# Altium PCB NucleoClone.PcbDoc (part 2 of 3)
Units mm, origin at the board's own origin, x right, y up, seen from the top; angles counter-clockwise.
Board outline 100 x 100 mm, 4 copper layers (Top Layer, Signal Layer 2, Signal Layer 1, Bottom Layer), stack 0.778 mm thick; 118 components, 177 nets, 571 pads, 394 vias.
Unrouted connection lines stored in the file: 5.
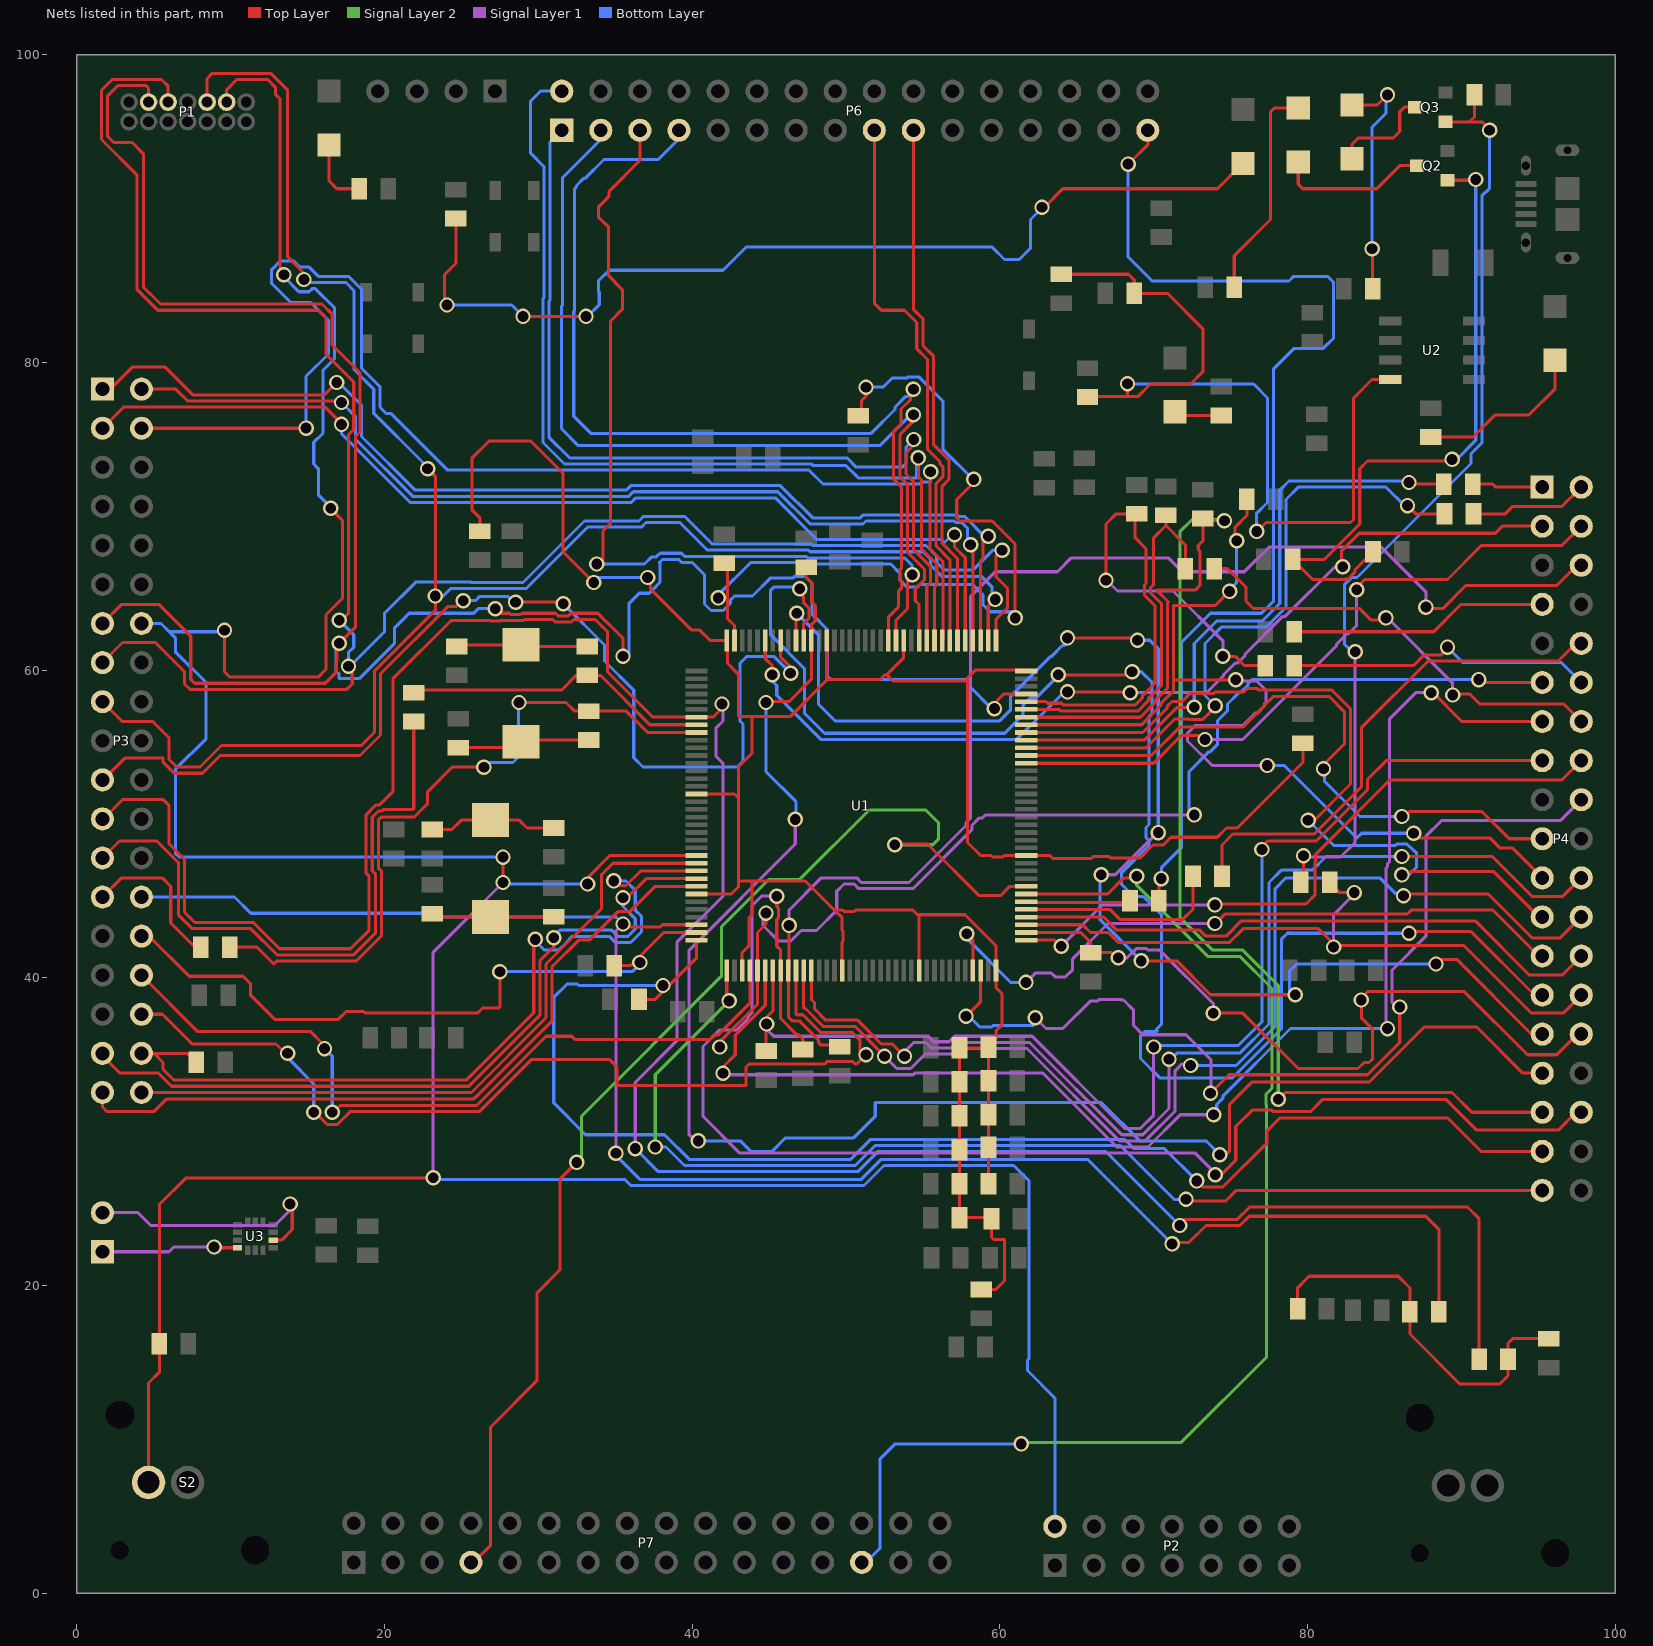
[diagram p4: the nets of this part, all layers, seen from the top]

## Via types
v1: diameter 1, hole 0.7, Top Layer to Bottom Layer, tented both sides, 390 vias
v2: diameter 1.27, hole 0.711, Top Layer to Bottom Layer, 4 vias

## Nets (pads, with @x,y where several pads share a name; then routed paths per layer and width w, separated by ;. In a path a pad name is that pad's centre, name@x,y a point inside that pad or via, vN(x,y) a via of type N, cw(c..) or ccw(c..) an arc to the next point about the centre after c; other vN are vias at no path point) (continued)
MCU_VDD: C8.2 C17.2 C18.2 C19.2 C20.2 C21.2 C22.2 C23.2 C24.2 C25.2 C26.2 C27.2 R48.2 R50.2 R51.1 U1.VDD | length 185.4
  Top Layer w0.2: R50.2@26.2,69.04 26.2,69.9 25.7,70.4 25.7,73.8 26.8,74.9 29.5,74.9 31.6,72.8 31.6,67.7 v1(33.6,65.7) ; v1@37.1,65.9 37.3,65.7 37.3,65.269 39.969,62.6 40.5,62.6 41.175,61.925 U1.VDD@42.25,61.925 42.3,61.875 42.3,60.44 43,59.74 43,57 43.9,57 ; U1.VDD@40.275,45.45 42.55,45.45 43,45.9 43,46.3 ; U1.VDD@40.275,51.95 42.75,51.95 43,51.7 ; U1.VDD@43.25,40.475 43.25,41.65 43.7,42.1 43.7,43.9 43.9,44.1 43.9,46.3 ; U1.VDD@48.75,61.925 48.75,59.45 48.8,59.4 ; U1.VDD@49.75,40.475 49.75,42.329 49.8,42.379 49.8,43.041 49.75,43.091 49.75,43.9 49.25,44.4 ; U1.VDD@53.75,61.925 53.75,60.8 52.65,59.7 ; U1.VDD@54.75,40.475 54.75,44 54.65,44.1 ; R48.2@58.8,19.74 59.74,19.74 60.3,20.3 60.3,23 59.6,23 59.46,23.14 C8.2@59.46,24.345 59.4,24.405 C26.2@57.382,24.405 C27.2@57.382,26.613 C24.2@57.382,28.821 C20.2@57.382,31.029 C22.2@57.382,33.238 C23.2@57.382,35.446 59.206,35.446 C19.2@59.26,35.5 ; C25.2@59.26,26.6 C21.2@59.26,29 C17.2@59.26,31.1 C18.2@59.26,33.3 C19.2@59.26,35.5 ; U1.VDD@61.725,59.95 61.675,60 58.4,60 57.9,59.5 57.9,59.3 ; R51.1@79.7,55.26 79.7,54 75.45,49.75 74.984,49.75 74.974,49.74 74.74,49.74 74.14,49.14 71.131,49.14 70.631,48.64 69.96,48.64 69.12,47.8 67.197,47.8 67.097,47.9 66.103,47.9 65.963,47.76 63.44,47.76 63.25,47.95 U1.VDD@61.725,47.95 60.281,47.95 60.181,47.85 59.519,47.85 59.419,47.95 58.75,47.95 57.9,48.8 57.9,59.3 ; 43,46.3 43,51.7 ; 43,46.3 43.9,46.3 ; 43,51.7 43,53.71 43.9,54.61 43.9,57 ; 43.9,46.3 47.35,46.3 49.25,44.4 ; 43.9,57 46.4,57 48.8,59.4 ; 48.8,59.4 52.24,59.4 52.54,59.7 52.65,59.7 ; 49.25,44.4 49.779,44.4 49.869,44.31 50.531,44.31 50.621,44.4 54.35,44.4 54.65,44.1 ; 52.65,59.7 53.05,59.3 57.9,59.3 ; 54.65,44.1 57.741,44.1 59.75,42.091 U1.VDD@59.75,40.475 59.75,39.354 60.15,38.954 60.15,36.95 59.75,36.55 59.75,35.99 C19.2@59.26,35.5
  Bottom Layer w0.2: v1@33.829,66.029 v1(37.1,66.029)
NetC2_1: C2.1 R24.1 R26.2 R28.1 | length 25.1
  Top Layer w0.2: C2.1@79.36,18.5 79.36,19.86 80.1,20.6 85.9,20.6 86.66,19.84 R28.1@86.66,18.3 86.66,16.84 89.9,13.6 92.5,13.6 93.04,14.14 R24.1@93.04,15.2 93.04,16.24 93.34,16.54 R26.2@95.7,16.54
NetC31_2: C31.2 R58.2 R59.1 U2.ADJ | length 58.7
  Top Layer w0.2: R58.2@64,85.74 68.36,85.74 68.74,85.36 C31.2@68.74,84.5 70.9,84.5 73.2,82.2 73.2,79.4 72.4,78.6 69.8,78.6 69,77.8 68.3,77.8 ; R59.1@65.7,77.76 65.74,77.8 68.3,77.8 ; v1(68.3,78.621) 68.3,77.8 ; v1@76.8,69.1 77.3,69.6 82.8,69.6 83,69.8 83,77.7 84.195,78.895 U2.ADJ@85.375,78.895
  Bottom Layer w0.2: v1@68.3,78.6 76.5,78.6 77.4,77.7 77.4,70.9 76.7,70.2 v1(76.7,69.021)
NetD2_1: D2.1 Q2.3 | length 9.9
  Top Layer w0.2: D2.1@79.4,93.05 79.4,91.6 79.7,91.3 84.5,91.3 86,92.8 Q2.3@87.1,92.8
NetD2_2: D2.2 R9.2 | length 14.3
  Top Layer w0.2: R9.2@75.24,84.9 75.24,86.94 77.6,89.3 77.6,96.3 77.85,96.55 D2.2@79.4,96.55
NetD3_1: D3.1 Q3.3 | length 6.8
  Top Layer w0.2: D3.1@82.9,93.25 82.9,94.2 83.3,94.6 85.585,94.6 86,95.015 86,96.3 86.3,96.6 Q3.3@86.97,96.6
NetD3_2: D3.2 R16.2 | length 15.3
  Top Layer w0.2: D3.2@82.9,96.75 84.55,96.75 v1(85.2,97.4) ; R16.2@84.24,84.8 v1@84.24,87.176
  Bottom Layer w0.2: v1(84.2,87.4) 84.2,95.3 85.1,96.2 v1@85.1,97.4
NetD4_1: D4.1 R53.1 | length 3.1
  Top Layer w0.2: D4.1@71.4,76.8 71.64,76.56 R53.1@74.4,76.56
NetD8_1: D8.1 R54.1 | length 4.5
  Top Layer w0.2: D8.1@16.4,94.15 16.4,91.8 16.9,91.3 R54.1@18.36,91.3
NetD9_1: D9.1 R56.1 | length 11.3
  Top Layer w0.2: R56.1@88,75.16 90.76,75.16 92.2,76.6 94.4,76.6 96.1,78.3 D9.1@96.1,80.15
NetD12_1: D12.1 R60.1 | length 64.4
  Top Layer w0.2: v1@23.9,84 23.9,85.7 24.64,86.44 R60.1@24.64,89.36 ; v1(29,83) 32.82,83 v1@32.96,83.14 ; v1(62.74,90.1) 62.9,90.1 64.1,91.3 74.15,91.3 D12.1@75.8,92.95
  Bottom Layer w0.2: v1(24.06,83.74) 28.26,83.74 v1(29,83) ; v1(33.1,83) 33.2,83 33.96,83.76 33.96,84.571 33.9,84.631 33.9,85.3 34.6,86 40.303,86 ; 40.303,86 42,86 43.5,87.5 59.5,87.5 60.3,86.7 61.271,86.7 62,87.429 62,89.3 v1@62.7,90
NetP4_1: P4.1 R2.1 | length 4.6
  Top Layer w0.2: R2.1@90.74,72.1 92.04,72.1 92.24,71.9 P4.1@95.26,71.9
NetP4_2: P4.2 R3.2 | length 7.7
  Top Layer w0.2: R3.2@90.79,70.16 92.86,70.16 93.35,70.65 96.55,70.65 P4.2@97.8,71.9
NetP4_7: P4.7 R1.2 | length 16.9
  Top Layer w0.2: R1.2@79.14,62.5 88.2,62.5 89.98,64.28 P4.7@95.26,64.28
NetP4_10: P4.10 R4.2 | length 33.1
  Top Layer w0.2: R4.2@74.44,46.6 74.44,48.64 75.15,49.35 80.45,49.35 83.5,52.4 83.5,56.25 87.85,60.6 96.31,60.6 97.45,61.74 P4.10@97.8,61.74
NetP4_12: P4.12 R5.2 | length 19.9
  Top Layer w0.2: R5.2@79.14,60.3 86.9,60.3 87.6,61 88.7,61 v1@89,61.3
  Bottom Layer w0.2: v1(89.1,61.5) 90.11,60.49 96.51,60.49 P4.12@97.8,59.2
NetP4_14: P4.14 R6.2 | length 28.7
  Top Layer w0.2: R6.2@73.94,66.6 74.8,66.6 76,65.4 76,65.151 76,64.489 76.489,64 83.4,64 84.15,63.25 v1@84.9,63.25 ; v1@89.545,58.45 90.55,58.45 91.2,57.8 96.66,57.8 P4.14@97.8,56.66
  Signal Layer 1 w0.2: v1(85.1,63.4) 85.2,63.4 89.44,59.16 v1(89.44,58.39)
NetP6_31: P6.31 R7.1 | length 70.8
  Top Layer w0.2: v1@68.5,93.04 69.62,94.16 P6.31@69.62,95.1 ; R7.1@70.34,45 70.34,46.29 v1(70.5,46.45)
  Bottom Layer w0.2: v1(68.34,92.9) 68.34,86.86 69.9,85.3 78.8,85.3 79.1,85.6 81.3,85.6 81.7,85.2 81.7,81.6 81,80.9 79.1,80.9 77.8,79.6 77.8,64.5 77,63.7 73.7,63.7 71.8,61.8 71.8,48.45 70.5,47.15 v1(70.5,46.45)
NetP9_1: P9.1 U3.4 | length 8.8
  Top Layer w0.2: v1@9.05,22.45 U3.4@10.44,22.45
  Signal Layer 1 w0.2: P9.1@1.66,22.19 5.99,22.19 6.3,22.5 v1(8.92,22.5)
NetP9_2: P9.2 U3.9 | length 16.2
  Top Layer w0.2: U3.9@12.76,22.95 13.31,22.95 14,23.64 v1@14,25
  Signal Layer 1 w0.2: P9.2@1.66,24.73 3.97,24.73 4.8,23.9 12.86,23.9 13.86,24.9 v1(13.86,25.3)
NetQ2_1: Q2.1 R12.1 R15.1 | length 42.4
  Top Layer w0.2: R15.1@84.26,67.7 83.1,66.54 83.1,66.39 82.631,65.921 82.481,65.921 82.46,65.9 80.34,65.9 R12.1@79.04,67.2 81.1,67.2 83.4,69.5 83.4,73.1 83.9,73.6 v1@89.4,73.6 ; Q2.1@89.1,91.85 v1@90.95,91.85
  Bottom Layer w0.2: v1@89.6,73.6 90.94,74.94 v1(90.94,91.9)
  other v1: 89.4,73.701
NetQ3_1: Q3.1 R17.1 R18.1 | length 60.9
  Top Layer w0.2: R17.1@79.56,46.2 79.74,46.38 v1(79.74,47.94) ; Q3.1@88.97,95.65 90.55,95.65 ; R18.1@90.86,97.4 90.86,95.96 90.55,95.65 ; v1@91.7,95.3 91.35,95.65 90.55,95.65
  Signal Layer 1 w0.2: v1@79.9,47.85 82.15,47.85 83.1,48.8 v1(83.1,61.2)
  Bottom Layer w0.2: v1@83,61.1 82.4,61.7 82.4,65.553 82.869,66.021 83.221,66.021 90.633,73.433 90.633,74.067 91.34,74.774 91.34,90.84 91.84,91.34 v1(91.84,95.1)
NetR45_2: R45.2 R46.2 U1.PDR_ON | length 54.5
  Top Layer w0.2: v1@41.8,64.7 42.3,64.7 ; R46.2@42.1,66.96 42.3,66.76 42.3,64.7 ; U1.PDR_ON@42.75,61.925 42.75,62.9 42.3,63.35 42.3,64.7 ; R45.2@51.02,76.48 51.02,77.53 51.3,77.81 v1(51.3,78.4) ; v1@58.4,72.3 57.2,71.1 57.2,69.9 57.4,69.7 59.5,69.7 61,68.2 v1(61,63.4)
  Bottom Layer w0.2: v1(41.7,64.7) 41.7,64.9 43.8,67 47.234,67 47.334,66.9 52.9,66.9 53.5,66.3 53.5,65.868 53.969,65.4 54.631,65.4 54.801,65.57 58.23,65.57 58.9,64.9 58.9,64.269 59.369,63.8 60.8,63.8 v1@61,63.6 ; v1(51.3,78.4) 52.4,78.4 53,79 53.979,79 54.049,79.07 54.73,79.07 56.3,77.5 56.3,74.362 58.262,72.4 v1(58.3,72.4)
NRST: C3.2 P1.12 P2.2 P3.14 S2.2 U1.NRST | length 234.9
  Top Layer w0.2: S2.2@4.66,7.2 4.66,13.66 5.36,14.36 C3.2@5.36,16.2 5.36,25.26 7.1,27 v1(23.16,27) ; v1(9.6,62.6) 9.6,59.9 9.95,59.55 15.7,59.55 16.2,60.05 16.2,63.6 17.26,64.66 17.26,69.74 v1@16.5,70.5 ; P1.12@9.74,96.925 9.74,97.74 10.4,98.4 12.4,98.4 12.9,97.9 12.9,97.44 13.2,97.14 13.2,86.2 v1@13.5,85.9 ; v1(27.7,46.2) v1@27.7,47.6 ; 33.3,46.6 34.65,47.95 U1.NRST@40.275,47.95
  Signal Layer 1 w0.2: v1(23.16,27) 23.16,41.66 v1(27.7,46.2)
  Bottom Layer w0.2: P3.14@4.2,63.03 5.47,63.03 6,62.5 ; v1@9.2,62.5 6,62.5 ; v1(13.46,85.7) 13.46,85.569 14.429,84.6 15.091,84.6 15.291,84.8 15.5,84.8 16.76,83.54 16.76,80.26 16,79.5 16,75.411 15.4,74.811 15.4,73.4 15.7,73.1 15.7,71.4 v1@16.5,70.6 ; v1@23.1,26.9 35.6,26.9 36,26.5 51.166,26.5 52.466,27.8 60.9,27.8 61.9,26.8 61.9,15.231 61.8,15.131 61.8,14.469 63.58,12.689 P2.2@63.58,4.34 ; v1@27.4,46.1 v1(33.2,46.1) v1@33.5,46.1 ; v1(27.7,47.85) 6.65,47.85 6.4,48.1 6.4,53.55 8.4,55.55 8.4,59.2 6.4,61.2 6.4,62.1 6,62.5
  other v1: 16.5,70.519
OSC32_IN: C6.1 R42.1 XTAL2.2 | length 8.6
  Top Layer w0.2: C6.1@24.68,61.54 24.79,61.65 XTAL2.2@28.88,61.65 28.99,61.54 R42.1@33.18,61.54
OSC32_OUT: C7.1 R47.1 XTAL2.1 | length 8.7
  Top Layer w0.2: C7.1@24.78,54.96 28.49,54.96 XTAL2.1@28.88,55.35 28.99,55.46 R47.1@33.28,55.46
OSC_IN: C4.1 R37.1 XTAL1.2 | length 8.4
  Top Layer w0.2: C4.1@23.1,49.64 24.37,49.64 24.98,50.25 XTAL1.2@26.888,50.25 28.75,50.25 29.26,49.74 R37.1@31,49.74
OSC_OUT: C5.1 R38.1 XTAL1.1 | length 8
  Top Layer w0.2: C5.1@23.1,44.16 23.31,43.95 XTAL1.1@26.888,43.95 26.898,43.96 R38.1@31,43.96
PA0: P3.28 R28.2 U1.PA0 | length 115.2
  Top Layer w0.2: v1@35.5,43.45 35.65,43.3 37.931,43.3 38.081,43.45 U1.PA0@40.275,43.45 ; v1@71.4,22.8 72.3,22.8 73.4,23.9 75.606,23.9 76.206,24.5 87.7,24.5 88.54,23.66 R28.2@88.54,18.3
  Signal Layer 1 w0.2: v1(35.04,28.6) 35.04,43.04 v1(35.5,43.5)
  Bottom Layer w0.2: P3.28@4.2,45.25 10.25,45.25 11.3,44.2 23.366,44.2 23.616,43.95 35.05,43.95 v1(35.5,43.5) ; v1@35,28.5 36.6,26.9 51,26.9 52.3,28.2 65.7,28.2 v1(71.2,22.7)
PA1: P3.30 R19.1 U1.PA1 | length 44.2
  Top Layer w0.2: P3.30@4.2,42.71 4.69,42.71 7.3,40.1 10.8,40.1 11.3,39.6 11.3,38.866 12.866,37.3 17,37.3 17.5,37.8 18.666,37.8 18.766,37.7 26.034,37.7 26.374,38.04 27.44,38.04 27.5,38.1 v1(27.5,40.4) ; R19.1@34.94,40.8 36,40.8 38.15,42.95 U1.PA1@40.275,42.95
  Bottom Layer w0.2: v1@27.5,40.4 32.863,40.4 36.1,40.4 v1@36.6,40.9
  other v1: 36.6,41
PA2: P4.35 R20.1 U1.PA2 | length 90.8
  Top Layer w0.2: R20.1@36.54,38.6 37.6,38.6 40.275,41.275 U1.PA2@40.275,42.45 ; v1@73,26.613 73.213,26.4 73.668,26.4 74.5,26.4 77.38,29.28 77.38,30.06 78.22,30.9 80.366,30.9 89.1,30.9 91.28,28.72 P4.35@95.26,28.72
  Bottom Layer w0.2: v1@38,39.5 32.631,39.5 32.531,39.6 31.869,39.6 31,38.731 31,31.869 33.069,29.8 38.2,29.8 39.8,28.2 50.3,28.2 51.6,29.5 68.1,29.5 68.7,28.9 70.7,28.9 v1(72.8,26.8)
  other v1: 38.1,39.5
PA3: P4.37 U1.PA3 | length 73.2
  Top Layer w0.2: v1@42.25,38.7 U1.PA3@42.25,40.475 ; v1@72.5,25.5 74.7,25.5 75.38,26.18 P4.37@95.26,26.18
  Signal Layer 2 w0.2: v1(37.6,29) 37.6,33.7 v1(42.4,38.5)
  Bottom Layer w0.2: v1@37.7,29 38.3,29 39.5,27.8 50.6,27.8 51.9,29.1 67.82,29.1 71.32,25.6 v1(72.1,25.6)
PA4: P3.32 U1.PA4 | length 50.1
  Top Layer w0.2: P3.32@4.2,40.17 4.2,40.166 7.866,36.5 15.2,36.5 v1@16,35.7 ; v1@16.8,31.4 17.1,31.7 26,31.7 30.5,36.2 32.169,36.2 32.369,36 41.169,36 41.469,36.3 41.7,36.3 43.75,38.35 U1.PA4@43.75,40.475
  Bottom Layer w0.2: v1(16.1,35.4) 16.6,34.9 v1(16.6,31.26)
PA5: P4.11 U1.PA5 | length 73.4
  Top Layer w0.2: v1(41.8,35.5) 41.8,35.834 44.25,38.284 U1.PA5@44.25,40.475 44.25,42.95 44.8,43.5 v1(44.8,44.21) ; v1@91.2,59.4 91.4,59.2 P4.11@95.26,59.2
  Signal Layer 1 w0.2: v1@44.7,44.2 44.6,44.1 44.6,43.4 45.6,42.4 46.421,42.4 47.1,43.079 48.079,43.079 49.4,44.4 49.4,44.968 49.4,45.631 49.869,46.1 50.531,46.1 50.831,45.8 54.35,45.8 58.2,49.65 58.2,49.931 58.669,50.4 58.869,50.4 59.059,50.59 v1(72.64,50.59)
  Bottom Layer w0.2: v1@72.6,50.6 72.3,50.9 72.3,53.4 73.59,54.69 73.671,54.69 74.14,55.159 74.14,56.698 74.8,57.359 74.8,57.8 75.571,58.571 75.671,58.571 76.14,59.04 76.14,59.14 76.39,59.39 v1(91.14,59.39)
PA6: P4.13 U1.PA6 | length 87.8
  Top Layer w0.2: v1(42,33.8) 42,34.2 42.8,35 42.8,36.269 44.75,38.219 U1.PA6@44.75,40.475 ; v1@88.109,58.59 90.039,56.66 P4.13@95.26,56.66
  Signal Layer 1 w0.2: v1(42,33.8) 42.1,33.7 54.366,33.7 54.466,33.8 62.803,33.8 67.603,29 69.628,29 71.728,31.1 v1(73.9,31.1) ; v1@85.1,36.9 85.1,47.121 85.206,47.227 85.206,47.425 85.34,47.559 85.34,56.84 87.04,58.54 v1(88.04,58.54)
  Bottom Layer w0.2: v1@74.1,31.26 74.1,31.769 74.5,32.169 74.5,32.303 78.897,36.7 v1(85.2,36.7)
PA7: P4.15 R21.1 U1.PA7 | length 77.9
  Top Layer w0.2: R21.1@44.8,35.64 44.8,37.4 45.275,37.875 45.25,37.9 U1.PA7@45.25,40.475 ; v1@77,48.5 77.4,48.9 80.566,48.9 83.9,52.234 83.9,52.9 85.12,54.12 P4.15@95.26,54.12
  Signal Layer 1 w0.2: v1@44.9,36.7 44.9,36.6 45.3,36.2 55.345,36.2 55.703,35.843 56.697,35.843 57.054,36.2 62.1,36.2 68.1,30.2 69.131,30.2 70,31.068 v1(70,35.5)
  Bottom Layer w0.2: v1@69.9,35.6 75.5,35.6 77.04,37.14 v1(77.04,48.34)
  other v1: 44.84,37
PA8: P4.23 U1.PA8 | length 51.3
  Top Layer w0.2: U1.PA8@61.725,55.95 69.284,55.95 70.88,57.546 70.88,57.649 71.191,57.96 71.86,57.96 72.39,58.49 73.9,58.49 73.981,58.571 75.84,58.571 76.068,58.8 76.731,58.8 76.831,58.7 81.6,58.7 82.8,57.5 82.8,52.6 80.4,50.2 v1@80.3,50.2 ; v1@86.5,46.7 86.7,46.9 92.1,46.9 95.04,43.96 P4.23@95.26,43.96
  Bottom Layer w0.2: v1@80.1,50.2 81.7,48.6 85.719,48.6 85.809,48.69 86.471,48.69 86.652,48.509 86.691,48.509 87.1,48.1 87.1,47.2 86.59,46.69 v1(86.14,46.69)
  other v1: 80.04,50.24
PA9: P4.21 R23.1 U1.PA9 | length 66.7
  Top Layer w0.2: U1.PA9@61.725,56.45 69.219,56.45 70.48,57.712 70.48,57.849 71.3,58.669 71.3,59.4 ; v1(74.94,65.121) 74.921,65.121 74,64.2 71.3,64.2 71.3,59.4 ; v1@75.24,68.6 75.3,68.66 75.3,69.3 76.06,70.06 R23.1@76.06,71.1 ; v1(75.34,59.371) 71.329,59.371 71.3,59.4 ; v1(86.9,49.4) 87.2,49.1 91.85,49.1 92.5,48.45 93.31,48.45 P4.21@95.26,46.5
  Signal Layer 1 w0.2: v1@75.6,59.3 76.7,59.3 77.3,58.7 77.3,57.9 77.2,57.8 77.2,57.669 76.731,57.2 76.6,57.2 75.79,56.39 72.69,56.39 72.2,55.9 72.2,55.4 73.8,53.8 v1(77.38,53.8)
  Bottom Layer w0.2: v1@74.9,65.2 75.4,65.7 v1(75.4,68.421) ; v1(77.38,53.8) 78.5,53.8 83.21,49.09 83.52,49.4 v1(86.9,49.4)
PA10: P4.33 R25.1 U1.PA10 | length 87.1
  Top Layer w0.2: U1.PA10@61.725,56.95 61.735,56.94 69.143,56.94 70.08,57.877 70.08,58.014 70.9,58.834 70.9,64.366 70.967,64.433 70.2,65.2 72.7,65.2 73,65.5 73,67.74 72.9,67.84 72.9,68.1 73.2,68.4 R25.1@73.2,69.86 73.339,69.721 v1(74.6,69.721) ; v1@78.3,32.3 78.55,32.55 89.395,32.55 90.685,31.26 P4.33@95.26,31.26
  Signal Layer 2 w0.2: v1@74.5,69.8 72.5,69.8 71.7,69 71.7,43.94 73.84,41.8 75.8,41.8 78.1,39.5 v1(78.1,32.1)
PA11: R6.1 R27.1 U1.PA11 | length 24.7
  Top Layer w0.2: U1.PA11@61.725,57.45 63.843,57.45 63.953,57.34 68.977,57.34 69.68,58.043 69.68,58.18 70.5,59 70.5,64.334 69.8,65.034 69.8,65.366 70,65.566 70,68.6 70.8,69.4 ; R27.1@70.8,70.06 70.8,69.4 ; R6.1@72.06,66.6 72.06,68.14 70.8,69.4
PA12: R5.1 R29.1 U1.PA12 | length 39.8
  Top Layer w0.2: U1.PA12@61.725,57.95 63,57.95 63.1,57.85 64.009,57.85 64.119,57.74 68.811,57.74 69.28,58.209 69.28,58.346 70.1,59.166 70.1,64.169 69.4,64.869 69.4,65.531 69.5,65.631 69.5,67.9 68.8,68.6 68.8,69.66 R29.1@68.48,69.98 ; v1(66.9,65.85) 66.9,69.5 67.56,70.16 R29.1@68.9,70.16 ; v1(74.5,60.9) 75.3,60.9 75.9,60.3 R5.1@77.26,60.3
  Signal Layer 1 w0.2: v1@67,65.8 67.65,65.15 71.261,65.15 74.5,61.911 v1(74.5,60.9)
PA13: P1.4 P3.13 U1.PA13 | length 143.1
  Top Layer w0.2: P3.13@1.66,63.03 2.91,64.28 5.32,64.28 7.4,62.2 7.4,59.4 7.65,59.15 16.15,59.15 16.86,59.86 16.86,60.581 16.9,60.621 v1@16.9,61.74 ; P1.4@4.66,96.925 4.66,97.84 4.5,98 2.66,98 2,97.34 2,94.7 2.4,94.3 3.6,94.3 4.32,93.58 4.32,84.914 5.434,83.8 15.934,83.8 16.6,83.134 16.6,81.134 18.4,79.334 18.4,75.483 18.1,75.183 18.1,62.79 v1(17.06,61.75) ; v1@27.2,63.8 27.3,63.7 28.109,63.7 28.189,63.62 28.852,63.62 28.932,63.7 31.109,63.7 31.289,63.52 31.952,63.52 32.132,63.7 33.866,63.7 35.5,62.066 v1(35.5,60.9) ; v1@59.75,57.45 59.75,57.95 60.25,58.45 U1.PA13@61.725,58.45
  Bottom Layer w0.2: v1(17.06,61.75) 16.86,61.55 16.86,59.919 17.05,59.729 17.05,59.45 18.35,59.45 20.66,61.76 20.66,62.76 21.6,63.7 25.8,63.7 26.1,64 v1(27.2,64) ; v1@35.6,60.8 35.9,61.1 35.9,64.35 36.55,65 37.2,65 37.429,65.229 37.431,65.229 37.9,65.697 37.9,66.969 37.869,67 38.069,67.2 39.131,67.2 39.331,67 40,67 40.8,66.2 40.8,64.3 41.22,63.88 42.011,63.88 42.5,64.368 42.5,64.569 42.751,64.82 43.92,64.82 45.1,66 46.569,66 46.669,66.1 47.331,66.1 47.8,65.631 47.8,63.634 48.8,62.634 48.8,59.6 49,59.4 57.75,59.4 58.1,59.05 58.1,58.869 59.469,57.5 v1(59.65,57.5)
PA14: P1.6 P3.15 U1.PA14 | length 132.7
  Top Layer w0.2: P3.15@1.66,60.49 2.97,61.8 5.1,61.8 7,59.9 7,59.1 7.35,58.75 17.55,58.75 17.9,59.1 17.9,59.8 v1@17.7,60 ; P1.6@5.93,96.925 5.93,97.97 5.5,98.4 2.3,98.4 1.6,97.7 1.6,94.5 3.92,92.18 3.92,84.74 5.26,83.4 15.7,83.4 16.2,82.9 16.2,80.531 18,78.731 18,75.648 17.66,75.308 17.66,63.7 v1@17.3,63.34 ; U1.PA14@59.75,61.925 59.75,63.306 60.5,64.056 60.5,65.319 59.75,66.069 59.75,67.45 60.1,67.8 v1(60.15,67.8)
  Bottom Layer w0.2: v1(17.06,63.25) 18,62.31 18,61.5 17.66,61.16 v1(17.66,60.25) 17.75,60.25 20,62.5 20,63.7 22.02,65.72 25.617,65.72 25.637,65.7 29,65.7 33,69.7 36.537,69.7 36.837,70 39.5,70 41.3,68.2 47.731,68.2 47.832,68.1 55.2,68.1 55.9,67.4 55.9,67 56.4,66.5 58.25,66.5 59.55,67.8 v1(60.15,67.8)
PA15: P1.10 P3.17 U1.PA15 | length 120.5
  Top Layer w0.2: P3.17@1.66,57.95 2.95,56.66 4.94,56.66 5.99,55.61 5.99,54.21 6.5,53.7 8,53.7 9.4,55.1 18.49,55.1 19.34,55.95 19.34,59.937 23.3,63.897 v1@23.3,64.7 ; P1.10@8.47,96.925 8.47,98.47 8.8,98.8 12.6,98.8 13.7,97.7 13.7,86.876 v1@14.9,85.676 ; v1(22.8,73.1) 23.3,72.6 v1(23.3,64.82) ; U1.PA15@59.25,61.925 59.25,64.15 v1(59.7,64.6)
  Bottom Layer w0.2: v1(14.76,85.4) 14.96,85.2 17.491,85.2 18.02,84.671 18.02,79.546 19.3,78.266 19.3,76.7 22.5,73.5 v1@22.5,72.9 ; v1(23.3,64.82) 23.82,64.82 24.32,65.32 25.452,65.32 25.472,65.3 29.2,65.3 33.2,69.3 36.703,69.3 37.003,69.6 39.2,69.6 41,67.8 47.566,67.8 47.666,67.7 55,67.7 55.5,67.2 55.5,66.834 56.234,66.1 58.8,66.1 59.5,65.4 59.5,65.1
PB0: P3.34 U1.PB0 | length 64.4
  Top Layer w0.2: P3.34@4.2,37.63 5.57,37.63 7.5,35.7 12.94,35.7 v1@13.5,35.14 ; v1@15.5,31.229 16.269,30.46 16.931,30.46 17.771,31.3 26.166,31.3 29.566,34.7 34.6,34.7 35.1,34.2 35.1,33 43.5,33 43.5,34.2 43.7,34.4 48.609,34.4 48.777,34.568 50.423,34.568 50.591,34.4 50.7,34.4 v1(51.3,35) ; U1.PB0@46.75,40.475 46.75,37.65 46.8,37.6 47.2,37.6 48.352,36.448 50.423,36.448 50.9,35.971 50.9,35.19 v1@51,35.09
  Bottom Layer w0.2: v1(13.7,35.1) 13.7,34.8 15.4,33.1 v1(15.4,31.26)
PB1: P4.24 U1.PB1 | length 73.6
  Top Layer w0.2: U1.PB1@47.25,40.475 47.25,38.05 47.3,38 47.3,38.066 48.401,36.965 48.518,36.848 50.588,36.848 52.3,35.136 52.3,35.1 v1@52.4,35 ; v1@86.31,45.45 91.75,45.45 94.6,42.6 96.44,42.6 P4.24@97.8,43.96
  Signal Layer 1 w0.2: v1(52.5,34.9) 53.3,34.1 54.2,34.1 55.143,35.043 57.028,35.043 57.386,35.4 61.769,35.4 67.769,29.4 69.463,29.4 71.4,31.337 71.4,33.969 71.831,34.4 v1@72.3,34.4
  Bottom Layer w0.2: v1(72.4,34.3) 75.366,34.3 77.9,36.834 77.9,45.8 78.6,46.5 84.7,46.5 85.7,45.5 v1@86.3,45.5
  other v1: 86.24,45.34
PB2: P4.22 U1.PB2 | length 72.7
  Top Layer w0.2: U1.PB2@47.75,40.475 47.75,38.6 47.95,38.4 47.95,37.981 48.684,37.248 50.754,37.248 52.302,35.7 53,35.7 v1(53.8,34.9) ; v1@86.26,47.9 92,47.9 94.6,45.3 96.6,45.3 P4.22@97.8,46.5
  Signal Layer 1 w0.2: v1@53.8,35.2 54.4,35.8 55.18,35.8 55.537,35.443 56.863,35.443 57.22,35.8 61.934,35.8 67.934,29.8 69.297,29.8 71,31.503 v1(71,34.7)
  Bottom Layer w0.2: v1@71.2,34.8 71.5,35.1 75.6,35.1 77.5,37 77.5,46.2 78.3,47 80.32,47 81.21,47.89 v1(86.14,47.89)
PB3: P4.31 R22.2 U1.PB3 | length 107.7
  Top Layer w0.2: v1@44.95,57.95 46.3,57.95 47.75,59.4 U1.PB3@47.75,61.925 47.75,62.953 48,63.203 48,64.197 47.75,64.447 47.75,64.919 47.8,64.968 47.8,65.631 47.4,66.031 R22.2@47.4,66.7 ; v1@74.6,28.6 74.8,28.6 74.94,28.74 74.94,31.778 76.4,33.238 84.038,33.238 87.6,36.8 91,36.8 94,33.8 P4.31@95.26,33.8
  Signal Layer 1 w0.2: v1@40.1,29.5 39.8,29.8 39.8,41.8 46.7,48.7 v1(46.7,50.3)
  Bottom Layer w0.2: v1(40.4,29.4) 43.134,29.4 43.834,28.7 45.163,28.7 46.063,29.6 50.5,29.6 51.9,31 51.9,31.9 66.6,31.9 69.1,29.4 73.4,29.4 v1(74.3,28.5) ; v1(44.8,57.9) 44.8,53.4 46.76,51.44 v1@46.76,50.4
PB4: P4.27 U1.PB4 | length 103.8
  Top Layer w0.2: v1@46.9,65.1 47.25,64.75 47.25,64.381 47.6,64.031 47.6,63.369 47.25,63.019 U1.PB4@47.25,61.925 ; v1(63.8,59.7) 68.3,59.7 68.5,59.9 v1(68.6,59.9) ; v1@86.5,43 90.64,43 94.76,38.88 P4.27@95.26,38.88
  Bottom Layer w0.2: v1(47,65.3) 46.9,65.4 45.3,65.4 45.1,65.2 45.1,62.3 47.3,60.1 47.3,57.2 48.6,55.9 60.316,55.9 61.5,57.084 61.5,57.7 62,58.2 62.366,58.2 63.8,59.634 v1(63.8,59.7) ; v1(68.6,59.9) 69.2,59.9 69.9,59.2 69.9,57.2 69.7,57 69.7,49.971 69.5,49.771 69.5,49.109 69.7,48.909 69.7,48.6 67.9,46.8 67.9,46.1 68.7,45.3 69.32,45.3 70.5,44.12 70.5,36.969 70.2,36.669 70.2,36.5 69.4,36.5 69.14,36.24 69.14,34.76 70.4,33.5 72.068,33.5 75.131,33.5 78.3,36.669 78.3,42.5 78.7,42.9 ; 78.75,42.95 78.7,42.9 ; v1(86.6,42.9) 78.7,42.9
PB5: P4.29 U1.PB5 | length 88.9
  Top Layer w0.2: v1@46.6,63.8 46.75,63.65 U1.PB5@46.75,61.925 ; v1(64.4,62.1) 68.8,62.1 v1(68.954,61.946) v1@68.954,61.854 ; v1@68.8,41.1 v1(69.2,41.1) 71.5,41.1 73.7,38.9 v1(79.2,38.9) ; v1@88.4,40.96 88.64,41.2 89.7,41.2 94.56,36.34 P4.29@95.26,36.34
  Signal Layer 1 w0.2: v1(66.6,46.7) 67.5,46.7 v1@70.1,49.3
  Bottom Layer w0.2: v1(46.8,63.7) 48.2,62.3 48.2,57.8 49.3,56.7 59.981,56.7 59.991,56.709 60.7,57.419 60.7,58.297 63.303,60.9 63.369,60.9 64.069,61.6 64.2,61.6 64.4,61.8 v1(64.4,62.1) ; v1@66.431,46.6 66.5,46.531 66.5,43.8 v1(69.2,41.1) ; v1(68.954,61.946) 69.754,61.946 70.3,61.4 v1(70.3,49.44) ; v1@78.82,39 78.82,40.42 79.3,40.9 v1(88.355,40.9)
PB7: P3.21 U1.PB7 | length 69.9
  Top Layer w0.2: P3.21@1.66,52.87 1.72,52.87 3.15,54.3 5.59,54.3 5.59,54.044 6.334,53.3 8.166,53.3 9.316,54.45 18.406,54.45 19.74,55.784 19.74,59.771 24.1,64.131 24.631,64.131 v1@25,64.5 ; v1(28.52,64.42) v1@31.38,64.42 ; U1.PB7@45.75,61.925 45.75,60.85 46.4,60.2 v1(46.4,59.8)
  Bottom Layer w0.2: v1(25.12,64.52) 25.91,64.52 26.19,64.8 28,64.8 v1@28.28,64.52 ; v1(31.62,64.32) 34.3,61.64 34.3,60.6 36.2,58.7 36.2,54.3 36.8,53.7 42.91,53.7 43.3,54.09 43.3,56.5 43.1,56.7 43.1,60.431 43.569,60.9 45.3,60.9 v1(46.4,59.8)
PB8: P4.3 U1.PB8 | length 61.2
  Top Layer w0.2: U1.PB8@44.75,61.925 44.75,60.75 45.2,60.3 v1(45.2,59.7) ; v1(64.4,58.59) 68.16,58.59 v1@68.3,58.45 ; v1@82.2,66.6 82.2,67.734 83.366,68.9 92.2,68.9 92.66,69.36 P4.3@95.26,69.36
  Signal Layer 1 w0.2: v1(68.48,58.54) 73.44,58.54 ; 73.44,58.54 74.54,59.64 74.54,59.703 75.309,60.471 75.471,60.471 75.94,60.94 75.94,61.04 78.4,63.5 78.566,63.5 81.787,66.721 v1(82.3,66.721)
  Bottom Layer w0.2: v1(45.2,59.7) 45.2,59.3 45.5,59 45.5,58.36 48.36,55.5 61.1,55.5 63.1,57.5 v1@64.2,58.6
PB10: P4.25 U1.PB10 | length 45
  Top Layer w0.2: v1(57.85,42.86) 58.25,42.46 U1.PB10@58.25,40.475 ; v1@74.1,43.6 74.66,44.16 86.5,44.16 86.74,44.4 92.057,44.4 95.037,41.42 P4.25@95.26,41.42
  Signal Layer 1 w0.2: v1(61.7,39.7) 62.3,40.3 63.363,40.3 63.603,40.06 64.265,40.06 64.734,40.529 64.734,41.234 67.03,43.53 v1(73.98,43.53)
  Bottom Layer w0.2: v1@57.94,42.76 57.94,42.47 60.71,39.7 v1(61.7,39.7)
PB11: P4.18 U1.PB11 | length 63.4
  Top Layer w0.2: v1@58.1,37.8 58.75,38.45 U1.PB11@58.75,40.475 ; v1(73.7,32.5) 74.9,33.7 83.9,33.7 86,35.8 v1(86,38.1)
  Signal Layer 1 w0.2: v1(62.3,37.4) 63,36.7 64.1,36.7 65.88,38.48 66.346,38.48 66.466,38.6 67.829,38.6 67.869,38.56 68.04,38.56 68.7,37.9 68.7,36.9 69.3,36.3 72.1,36.3 73.74,34.66 v1@73.74,32.6 ; v1@85.6,38.3 85.5,38.4 85.5,40.5 87.7,42.7 87.7,49.195 88.745,50.24 96.46,50.24 P4.18@97.8,51.58
  Bottom Layer w0.2: v1(57.8,37.5) 58,37.5 58.7,36.8 59.471,36.8 59.571,36.9 62.2,36.9
PB12: P4.16 U1.PB12 | length 42.5
  Top Layer w0.2: U1.PB12@61.725,42.45 63.55,42.45 v1@63.9,42.1 ; v1@74.1,44.8 79.9,44.8 80.5,45.4 80.5,47.569 80.54,47.609 80.54,48.04 85.37,52.87 96.55,52.87 P4.16@97.8,54.12
  Signal Layer 1 w0.2: v1(64,42.06) 66.68,44.74 v1(73.98,44.74)
PB13: P4.30 R30.2 U1.PB13 | length 48.5
  Top Layer w0.2: U1.PB13@61.725,42.95 65.26,42.95 65.9,42.31 R30.2@65.9,41.64 67.26,41.64 v1@67.7,41.2 ; v1(73.88,37.7) 75.8,37.7 79.4,34.1 83.287,34.1 83.687,34.5 84,34.5 84.24,34.74 84.24,36.66 83.5,37.4 v1(83.5,38.56) ; v1@83.5,38.7 83.9,39.1 90.2,39.1 94.3,35 96.2,35 97.54,36.34 P4.30@97.8,36.34
  Signal Layer 1 w0.2: v1(67.7,41.3) 68.269,41.3 68.869,41.9 69.531,41.9 69.631,41.8 70.4,41.8 73.9,38.3 v1@73.9,37.8
PB14: P4.28 R17.2 U1.PB14 | length 45.3
  Top Layer w0.2: U1.PB14@61.725,43.45 65.4,43.45 65.9,42.95 67.04,42.95 67.69,42.3 74.92,42.3 75.82,43.2 80.7,43.2 81.5,42.4 v1@81.5,42.3 ; R17.2@81.44,46.2 82.1,45.54 v1(83.04,45.54) ; v1(81.7,42) 81.8,42.1 90.16,42.1 94.56,37.7 96.62,37.7 P4.28@97.8,38.88
  Signal Layer 1 w0.2: v1(81.7,42) 81.7,44.1 82.8,45.2 v1@82.8,45.5
PB15: P4.26 U1.PB15 | length 39
  Top Layer w0.2: U1.PB15@61.725,43.95 66.75,43.95 67.6,43.1 73,43.1 73.39,42.71 74.71,42.71 75.7,43.7 90.9,43.7 94.43,40.17 96.55,40.17 P4.26@97.8,41.42
PC0: P3.38 U1.PC0 | length 45.6
  Top Layer w0.2: P3.38@4.2,32.55 25.65,32.55 30.5,37.4 30.5,40.9 34.1,44.5 34.1,45.968 34.1,46.7 34.85,47.45 U1.PC0@40.275,47.45
PC1: P3.36 R32.1 U1.PC1 | length 54
  Top Layer w0.2: P3.36@4.2,35.09 5.01,35.09 ; R32.1@7.76,34.5 7.17,35.09 5.01,35.09 ; v1(29.8,42.5) 29.7,42.4 29.7,37.731 25.319,33.35 6.316,33.35 5.6,34.066 5.6,34.5 5.01,35.09 ; v1@35.169,46 35.7,46 36.65,46.95 U1.PC1@40.275,46.95
  Bottom Layer w0.2: v1@29.9,42.3 30.4,41.8 31.331,41.8 31.8,42.269 31.8,42.3 32.2,42.7 34.603,42.7 35.003,42.3 35.997,42.3 36.7,43.003 36.7,43.997 36.3,44.397 36.3,45.7 35.7,46.3 v1(34.9,46.3)
PC2: P3.35 U1.PC2 | length 49.7
  Top Layer w0.2: P3.35@1.66,35.09 1.66,34.94 2.8,33.8 5.3,33.8 6.15,32.95 25.484,32.95 30.1,37.566 30.1,41.1 31,42 v1(31,42.6) ; v1@35.7,45.3 35.86,45.3 37.01,46.45 U1.PC2@40.275,46.45
  Bottom Layer w0.2: v1@31.2,42.9 31.4,43.1 34.769,43.1 35.169,42.7 35.831,42.7 36.3,43.169 36.3,43.831 35.5,44.631 v1(35.5,45.2)
PC3: P3.37 U1.PC3 | length 47.8
  Top Layer w0.2: P3.37@1.66,32.55 1.66,31.6 1.96,31.3 5,31.3 5.834,32.134 25.8,32.134 25.966,32.3 26,32.3 30.9,37.2 30.9,40.734 32.616,42.45 33.319,42.45 35.169,44.3 35.95,44.3 37.6,45.95 U1.PC3@40.275,45.95
PC4: P4.34 R33.1 U1.PC4 | length 90.9
  Top Layer w0.2: v1@45.5,45.2 45.5,44.641 45.6,44.541 45.6,43.879 45.5,43.779 45.5,42.06 45.75,41.81 U1.PC4@45.75,40.475 45.75,37.35 46.8,36.3 46.9,36.3 47.2,36 R33.1@47.2,35.64 ; v1@74.2,27.3 74.5,27.3 75.34,28.14 75.34,30.34 76.4,31.4 77.668,31.4 77.768,31.3 80.2,31.3 81,32.1 89,32.1 91,30.1 96.3,30.1 97.46,31.26 P4.34@97.8,31.26
  Signal Layer 1 w0.2: v1(45.5,45.31) 44.51,45.31 43.9,44.7 43.9,37.757 43.64,37.497 43.64,37.34 42.9,36.6 41.769,36.6 40.7,35.531 40.7,31 43.1,28.6 72.7,28.6 v1@73.9,27.4
  other v1: 74,27.2
PC5: P4.6 R34.1 U1.PC5 | length 85.1
  Top Layer w0.2: v1(46.3,43.41) 46.3,40.525 U1.PC5@46.25,40.475 46.25,37.45 46.5,37.2 46.971,37.2 48.198,35.972 48.198,35.802 48.36,35.64 R34.1@49.6,35.64 ; v1@87.9,64 88.8,64 90.3,65.5 96.2,65.5 97.52,66.82 P4.6@97.8,66.82
  Signal Layer 1 w0.2: v1@46.3,43.5 46.3,44.4 48.4,46.5 50.697,46.5 50.997,46.2 54.1,46.2 57.8,49.9 57.8,50.097 58.1,50.397 58.1,64.8 59.7,66.4 63.75,66.4 64.65,67.3 70.95,67.3 71.85,66.4 75.9,66.4 77.5,68 84.8,68 87.7,65.1 v1(87.7,64.1)
PC6: P4.4 U1.PC6 | length 43.6
  Top Layer w0.2: U1.PC6@61.725,53.95 70,53.95 71.8,55.75 72.95,55.75 v1@73.1,55.6 ; v1@83.3,65.47 83.73,65.9 89.1,65.9 91.3,68.1 96.54,68.1 P4.4@97.8,69.36
  Signal Layer 1 w0.2: v1(73.34,55.49) 75.79,55.49 81.9,61.6 81.9,61.697 82.603,62.4 82.7,62.4 83.2,62.9 v1(83.2,65.221)
PC7: P4.19 U1.PC7 | length 42.9
  Top Layer w0.2: U1.PC7@61.725,54.45 69.85,54.45 71.7,56.3 75.8,56.3 76.7,57.2 76.731,57.2 77.2,57.669 77.2,57.7 77.8,58.3 81.4,58.3 82.4,57.3 82.4,55.2 v1@81.1,53.9 ; v1@86.4,50.59 86.61,50.8 91.35,50.8 93.11,49.04 P4.19@95.26,49.04
  Bottom Layer w0.2: v1@81.1,53.4 81.1,52.8 83.41,50.49 v1(86.14,50.49)
  other v1: 81.04,53.59
PC8: R3.1 U1.PC8 | length 42.1
  Top Layer w0.2: U1.PC8@61.725,54.95 69.5,54.95 71.39,56.84 72.259,56.84 72.309,56.79 73.19,56.79 73.74,57.34 v1@73.74,57.6 ; v1(86.5,70.701) 87.041,70.16 R3.1@88.91,70.16
  Bottom Layer w0.2: v1(74,57.69) 73.34,58.35 73.34,61.74 74.4,62.8 77.3,62.8 78.6,64.1 78.6,71.1 79.4,71.9 85.1,71.9 v1@86.35,70.65
PC9: R2.2 U1.PC9 | length 40.8
  Top Layer w0.2: U1.PC9@61.725,55.45 69.39,55.45 71.5,57.56 v1@72.46,57.56 ; v1(86.6,72.201) 86.701,72.1 R2.2@88.86,72.1
  Bottom Layer w0.2: v1(72.64,57.59) 72.64,61.74 74.1,63.2 77.066,63.2 78.2,64.334 78.2,71.7 78.8,72.3 v1@86.7,72.3
PC10: P3.1 U1.PC10 | length 71.9
  Top Layer w0.2: P3.1@1.66,78.27 2.17,78.27 3.6,79.7 5.74,79.7 7.54,77.9 16.1,77.9 v1(16.9,78.7) ; U1.PC10@58.75,61.925 58.75,67.11 58.9,67.26 58.9,68.4 59.2,68.7 v1(59.25,68.7)
  Bottom Layer w0.2: v1(16.9,78.7) 17.031,78.7 18.5,77.231 18.5,75.197 21.997,71.7 35.709,71.7 36.009,72 45.732,72 47.831,69.9 50.931,69.9 51.131,70.1 57.206,70.1 57.306,70 57.7,70 v1@59.125,68.575
PC11: P3.2 U1.PC11 | length 66.4
  Top Layer w0.2: P3.2@4.2,78.27 6.43,78.27 7.2,77.5 v1@17.1,77.5 ; v1(58.1,68.153) 58.25,68.003 U1.PC11@58.25,61.925
  Bottom Layer w0.2: v1(17.2,77.4) 18.1,76.5 18.1,75.031 21.831,71.3 35.875,71.3 36.174,71.6 45.566,71.6 47.666,69.5 51.097,69.5 51.297,69.7 57.04,69.7 57.14,69.6 57.531,69.6 57.9,69.231 57.9,68.169 57.8,68.069 57.8,68 v1@58,67.8
PC12: P3.3 U1.PC12 | length 67.5
  Top Layer w0.2: P3.3@1.66,75.73 3.03,77.1 16.14,77.1 v1@17.06,76.18 ; v1(57.05,68.8) 57.05,68.01 57.75,67.31 U1.PC12@57.75,61.925
  Bottom Layer w0.2: v1(17.2,75.98) 17.2,75.366 21.666,70.9 36.04,70.9 36.34,71.2 45.4,71.2 48.1,68.5 56.2,68.5 56.4,68.3 57,68.9 57.05,68.85 v1(57.05,68.8)
PC13: P3.23 R24.2 U1.PC13 | length 170.6
  Top Layer w0.2: P3.23@1.66,50.33 1.73,50.33 3,51.6 5.58,51.6 6,51.18 6,48.7 7,47.7 7,44.266 7.666,43.6 11.466,43.6 13.176,41.89 17.79,41.89 19,43.1 19,46.598 18.802,46.797 18.802,50.603 19.446,51.248 19.682,51.248 20.54,52.106 20.54,59.44 24.32,63.22 26.849,63.22 26.869,63.2 27.531,63.2 27.551,63.22 29.017,63.22 29.097,63.3 30.943,63.3 31.123,63.12 32.117,63.12 32.297,63.3 33.7,63.3 34.5,62.5 34.5,59.9 37.45,56.95 U1.PC13@40.275,56.95 41.35,56.95 41.94,57.54 v1(41.94,57.8) ; v1@71.7,24 72,24.3 75.44,24.3 76.24,25.1 90.4,25.1 91.16,24.34 R24.2@91.16,15.2
  Signal Layer 1 w0.2: v1(36.3,28.9) 36.3,33.2 39,35.9 39,42.306 42,45.306 42,53.959 41.54,54.419 41.54,56.231 42,56.691 42,57.7 v1@41.9,57.8
  Bottom Layer w0.2: v1(36.3,28.9) 37.8,27.4 50.766,27.4 52.066,28.7 66.9,28.7 v1(71.7,23.9)
PC14: P3.25 R35.2 | length 40.1
  Top Layer w0.2: P3.25@1.66,47.79 2.77,48.9 5.2,48.9 6.6,47.5 6.6,44.1 7.5,43.2 11.3,43.2 13.01,41.49 17.99,41.49 19.4,42.9 19.4,46.764 19.202,46.962 19.202,50.438 19.612,50.848 19.848,50.848 19.95,50.95 21.85,50.95 21.9,51 R35.2@21.9,56.66
PC14-OSC32_IN: R35.1 R42.2 U1.PC14 | length 20.2
  Top Layer w0.2: R35.1@21.9,58.54 22.06,58.7 31.5,58.7 32.46,59.66 R42.2@33.18,59.66 34.04,59.66 37.25,56.45 U1.PC14@40.275,56.45
PC15: P3.27 R36.2 | length 10.2
  Top Layer w0.2: P3.27@1.66,45.25 2.91,46.5 5.54,46.5 6.1,45.94 6.1,43.566 7.666,42 R36.2@8.06,42
PC15-OSC32_OUT: R36.1 R47.2 U1.PC15 | length 45.7
  Top Layer w0.2: R36.1@9.94,42 11.7,42 12.8,40.9 12.99,41.09 18.156,41.09 19.8,42.734 19.8,46.929 19.602,47.128 19.602,50.272 19.777,50.448 21.913,50.448 22.8,51.334 22.8,52.1 24.4,53.7 v1@26.4,53.7 ; v1(28.74,57.9) 31.8,57.9 32.36,57.34 R47.2@33.28,57.34 35.72,57.34 37.11,55.95 U1.PC15@40.275,55.95
  Bottom Layer w0.2: v1(26.46,53.69) 26.77,54 28.35,54 28.7,54.35 v1@28.7,57.8
PD0: P6.19 U1.PD0 | length 34.7
  Top Layer w0.2: P6.19@54.38,95.1 54.38,83.47 55,82.85 55,81.1 55.7,80.4 55.7,74.65 56.7,73.65 56.7,72.403 56.25,71.953 56.25,68.244 57.25,67.244 U1.PD0@57.25,61.925
PD1: P6.17 U1.PD1 | length 36.5
  Top Layer w0.2: P6.17@51.84,95.1 51.84,83.86 52.3,83.4 53.8,83.4 54.6,82.6 54.6,80.9 55.3,80.2 55.3,74.36 56.116,73.545 56.116,73.416 56.3,73.231 56.3,72.568 55.85,72.118 55.85,68.079 56.75,67.178 U1.PD1@56.75,61.925
PD2: P3.4 U1.PD2 | length 88.8
  Top Layer w0.2: P3.4@4.2,75.73 v1@14.97,75.73 ; v1@55.5,72.797 55.45,72.747 55.45,67.913 56.3,67.063 56.3,61.975 U1.PD2@56.25,61.925
  Bottom Layer w0.2: v1(14.9,75.74) 14.9,79.1 16.36,80.56 16.36,82.74 15.2,83.9 13.9,83.9 12.66,85.14 12.66,86.031 13.229,86.6 14.1,86.6 14.5,86.2 15.1,86.2 15.7,85.6 17.657,85.6 18.5,84.757 18.5,79.631 19.7,78.431 19.7,77.1 20.1,76.7 20.4,76.7 24.1,73 47.6,73 48.5,72.1 54.766,72.1 54.9,72.234 55.5,72.234 v1(55.5,72.9)
PD3: P6.2 U1.PD3 | length 63.8
  Top Layer w0.2: v1@54.75,73.7 54.75,73.281 54.7,73.231 54.7,72.568 54.9,72.368 54.9,67.897 55.9,66.897 55.9,65.537 55.75,65.387 U1.PD3@55.75,61.925
  Bottom Layer w0.2: P6.2@31.52,97.64 30.14,97.64 29.5,97 29.5,93.6 30.36,92.74 30.36,84.22 30.3,84.16 30.3,74.8 31.7,73.4 47.766,73.4 47.866,73.3 50,73.3 50.8,72.5 54.6,72.5 54.6,73.7 v1(54.7,73.8)
PD4: P6.1 U1.PD4 | length 60.3
  Top Layer w0.2: v1@54.5,75 54.5,74.731 53.9,74.131 53.9,72.75 54.4,72.25 54.4,67.831 55.5,66.731 55.5,65.703 55.25,65.453 U1.PD4@55.25,61.925
  Bottom Layer w0.2: P6.1@31.52,95.1 30.76,94.34 30.76,84.054 30.7,83.994 30.7,75.12 32.02,73.8 50.066,73.8 50.666,73.2 53.7,73.2 53.7,73.269 53.9,73.468 53.9,74.5 v1(54.4,75)
PD5: P6.3 U1.PD5 | length 60.7
  Top Layer w0.2: v1(54.38,76.6) 54.38,76.18 53.5,75.3 53.5,72.584 54,72.084 54,67.666 55.1,66.566 55.1,65.868 54.631,65.4 54.6,65.4 54.5,65.3 54.5,64.52 54.75,64.27 U1.PD5@54.75,61.925
  Bottom Layer w0.2: P6.3@34.06,95.1 34.06,94.494 31.56,91.995 31.56,83.723 31.5,83.663 31.5,75.7 32.6,74.6 52.2,74.6 54.2,76.6 v1(54.38,76.6)
PD6: P6.5 U1.PD6 | length 57.5
  Top Layer w0.2: v1@34.2,67 34.2,69.06 34.7,69.56 34.7,82.7 35.46,83.46 35.46,84.74 34.569,85.631 34.569,88.8 34.469,88.9 34,89.368 33.9,89.469 33.9,90.103 34.476,90.679 34.476,90.708 34.6,90.831 34.6,91.131 36.6,93.131 P6.5@36.6,95.1 ; U1.PD6@53.3,61.975 U1.PD6@53.25,61.925 53.25,63.25 54,64 54,66.2 54.3,66.5 v1(54.3,66.2)
  Bottom Layer w0.2: v1(33.8,66.9) 36.9,66.9 37.366,67.366 37.669,67.366 37.903,67.6 39.297,67.6 39.497,67.4 47.4,67.4 47.5,67.3 53.8,67.3 54.3,66.8 v1(54.3,66.2)
PD7: P6.7 U1.PD7 | length 64.4
  Top Layer w0.2: U1.PD7@52.75,61.925 52.75,63.45 53.4,64.1 53.4,65.12 53.6,65.32 53.6,65.768 53.5,65.868 53.5,66.531 53.6,66.631 53.6,71.919 53.1,72.419 53.1,75.54 53.58,76.02 53.58,76.98 54.2,77.6 v1@54.2,78
  Bottom Layer w0.2: P6.7@39.14,95.1 39.14,94.54 37.8,93.2 34.266,93.2 33.042,91.976 32.945,91.976 32.476,91.508 32.476,91.411 32.36,91.295 32.36,83.392 32.3,83.331 32.3,76.5 33.4,75.4 51.634,75.4 53.18,76.946 53.18,77.097 53.883,77.8 54.034,77.8 54.2,77.966 v1@54.2,78.1
  other v1: 54.38,78.27
PD8: R4.1 U1.PD8 | length 13.5
  Top Layer w0.2: U1.PD8@61.725,44.45 67.15,44.45 67.8,43.8 71.9,43.8 72.56,44.46 R4.1@72.56,46.6
PD9: R7.2 U1.PD9 | length 6.8
  Top Layer w0.2: U1.PD9@61.725,44.95 61.775,44.9 68.36,44.9 R7.2@68.46,45
PD10: P7.27 U1.PD10 | length 78.7
  Top Layer w0.2: U1.PD10@61.725,45.45 67.01,45.45 68.06,46.5 v1@68.7,46.5
  Signal Layer 2 w0.2: v1@61.6,9.8 71.8,9.8 77.334,15.334 77.334,31.734 77.3,31.769 77.3,32.431 77.7,32.831 77.7,39.3 75.6,41.4 73.51,41.4 68.9,46.01 v1(68.9,46.6)
  Bottom Layer w0.2: P7.27@51.02,2 51.3,2 52.2,2.9 52.2,8.7 53.2,9.7 v1(61.4,9.7)
PD11: P7.7 U1.PD11 | length 79.4
  Top Layer w0.2: P7.7@25.62,2 25.788,2 26.9,3.112 26.9,10.8 29.9,13.8 29.9,19.5 31.4,21 31.4,26.9 v1(32.5,28) ; v1@53.4,48.7 55.3,48.7 58.66,45.34 60.04,45.34 60.65,45.95 U1.PD11@61.725,45.95
  Signal Layer 2 w0.2: v1@32.8,28.2 32.8,31 41.9,40.1 41.9,43.3 45,46.4 47,46.4 51.5,50.9 55.2,50.9 56,50.1 56,49 55.65,48.65 v1(53.17,48.65)